# Altium PCB WAB_1_1_r3.PcbDoc (part 1 of 3)
Units mil, origin at the board's own origin, x right, y up, seen from the top; angles counter-clockwise.
Board outline 2714.17 x 3100 mil, 6 copper layers (TopLayer, GroundPlane1, MidLayer1, MidLayer2, GroundPlane2, BottomLayer), stack 59.8 mil thick; 41 components, 283 nets, 779 pads, 570 vias.
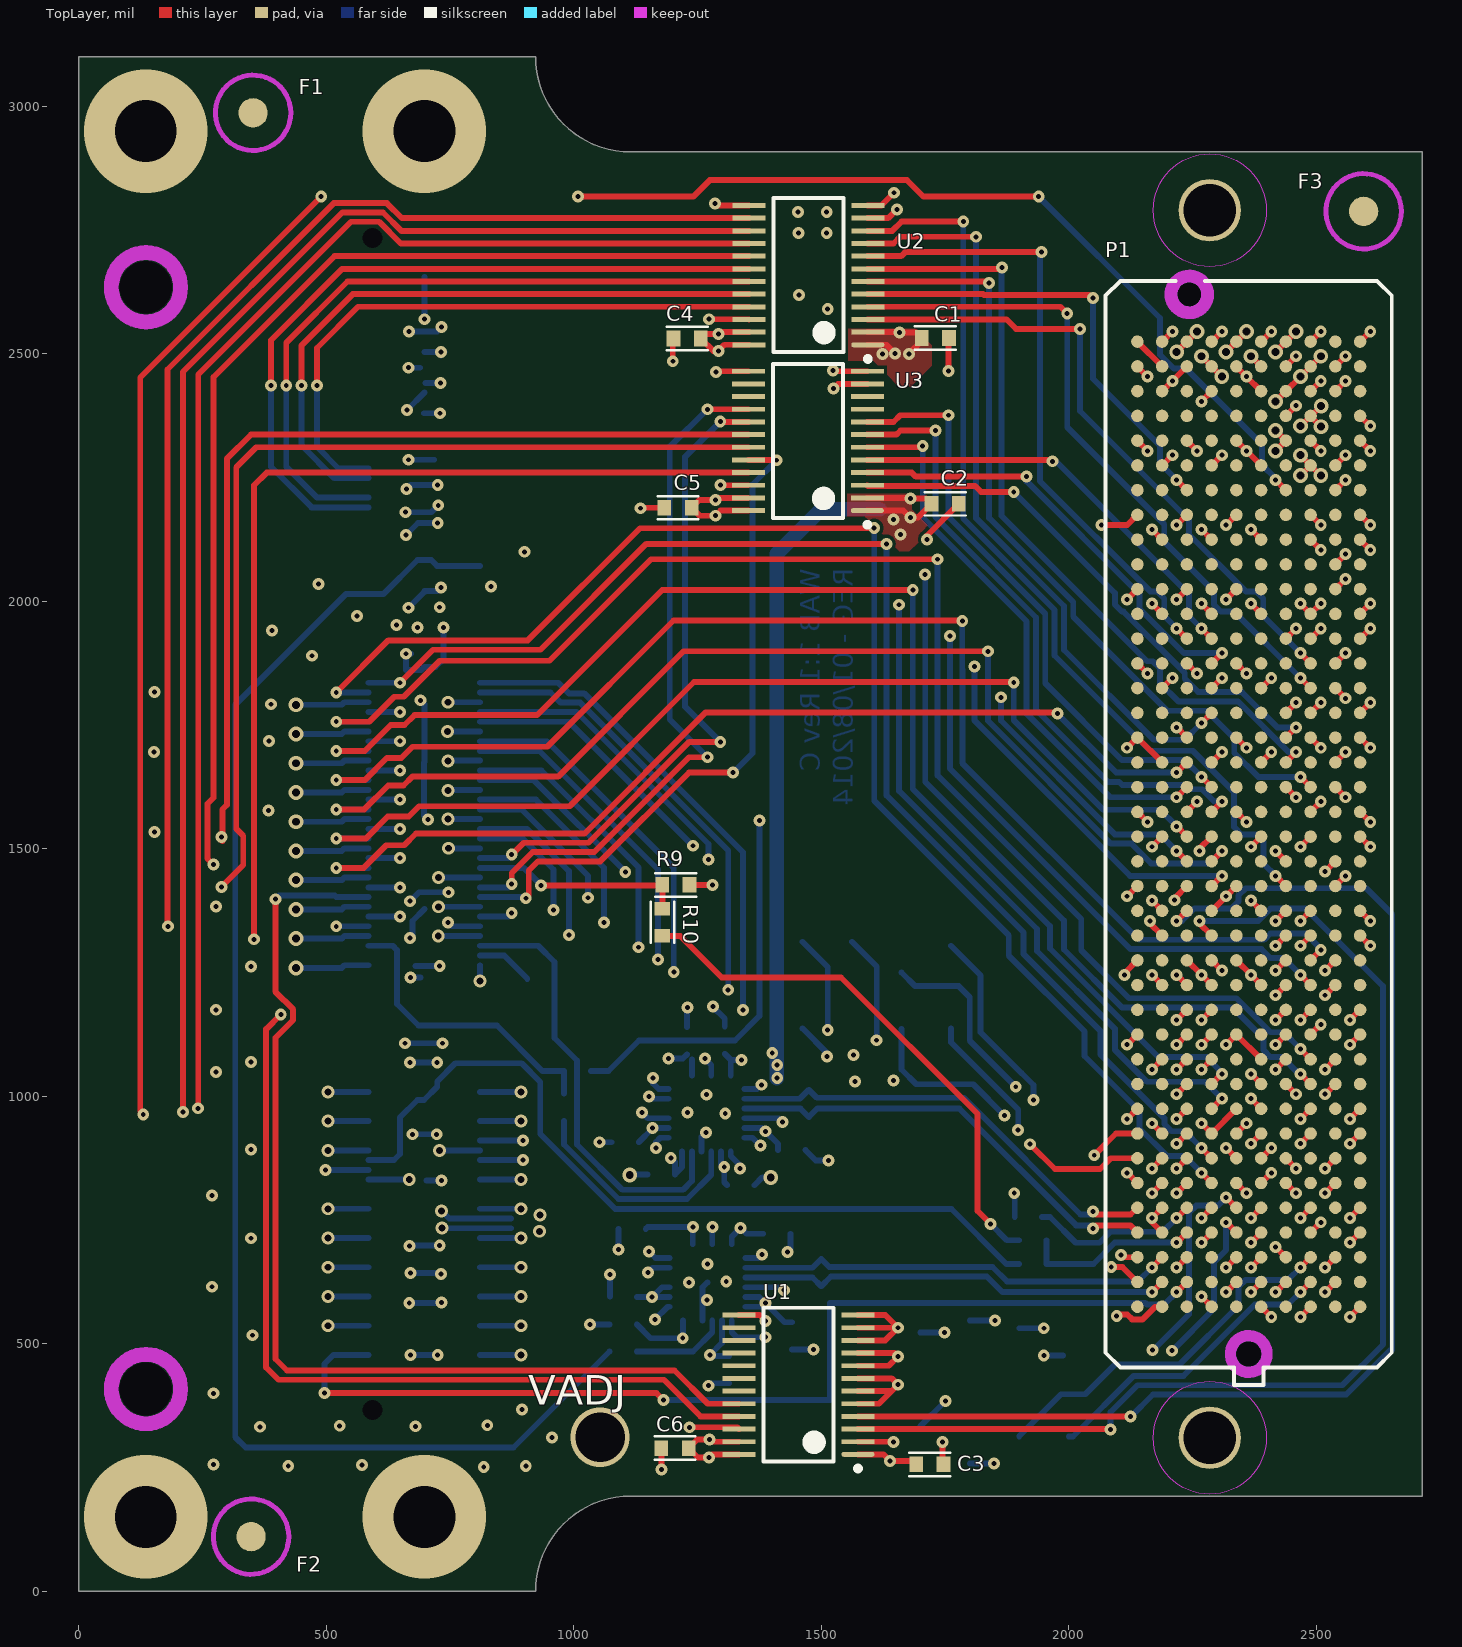
[diagram p0: TopLayer view]
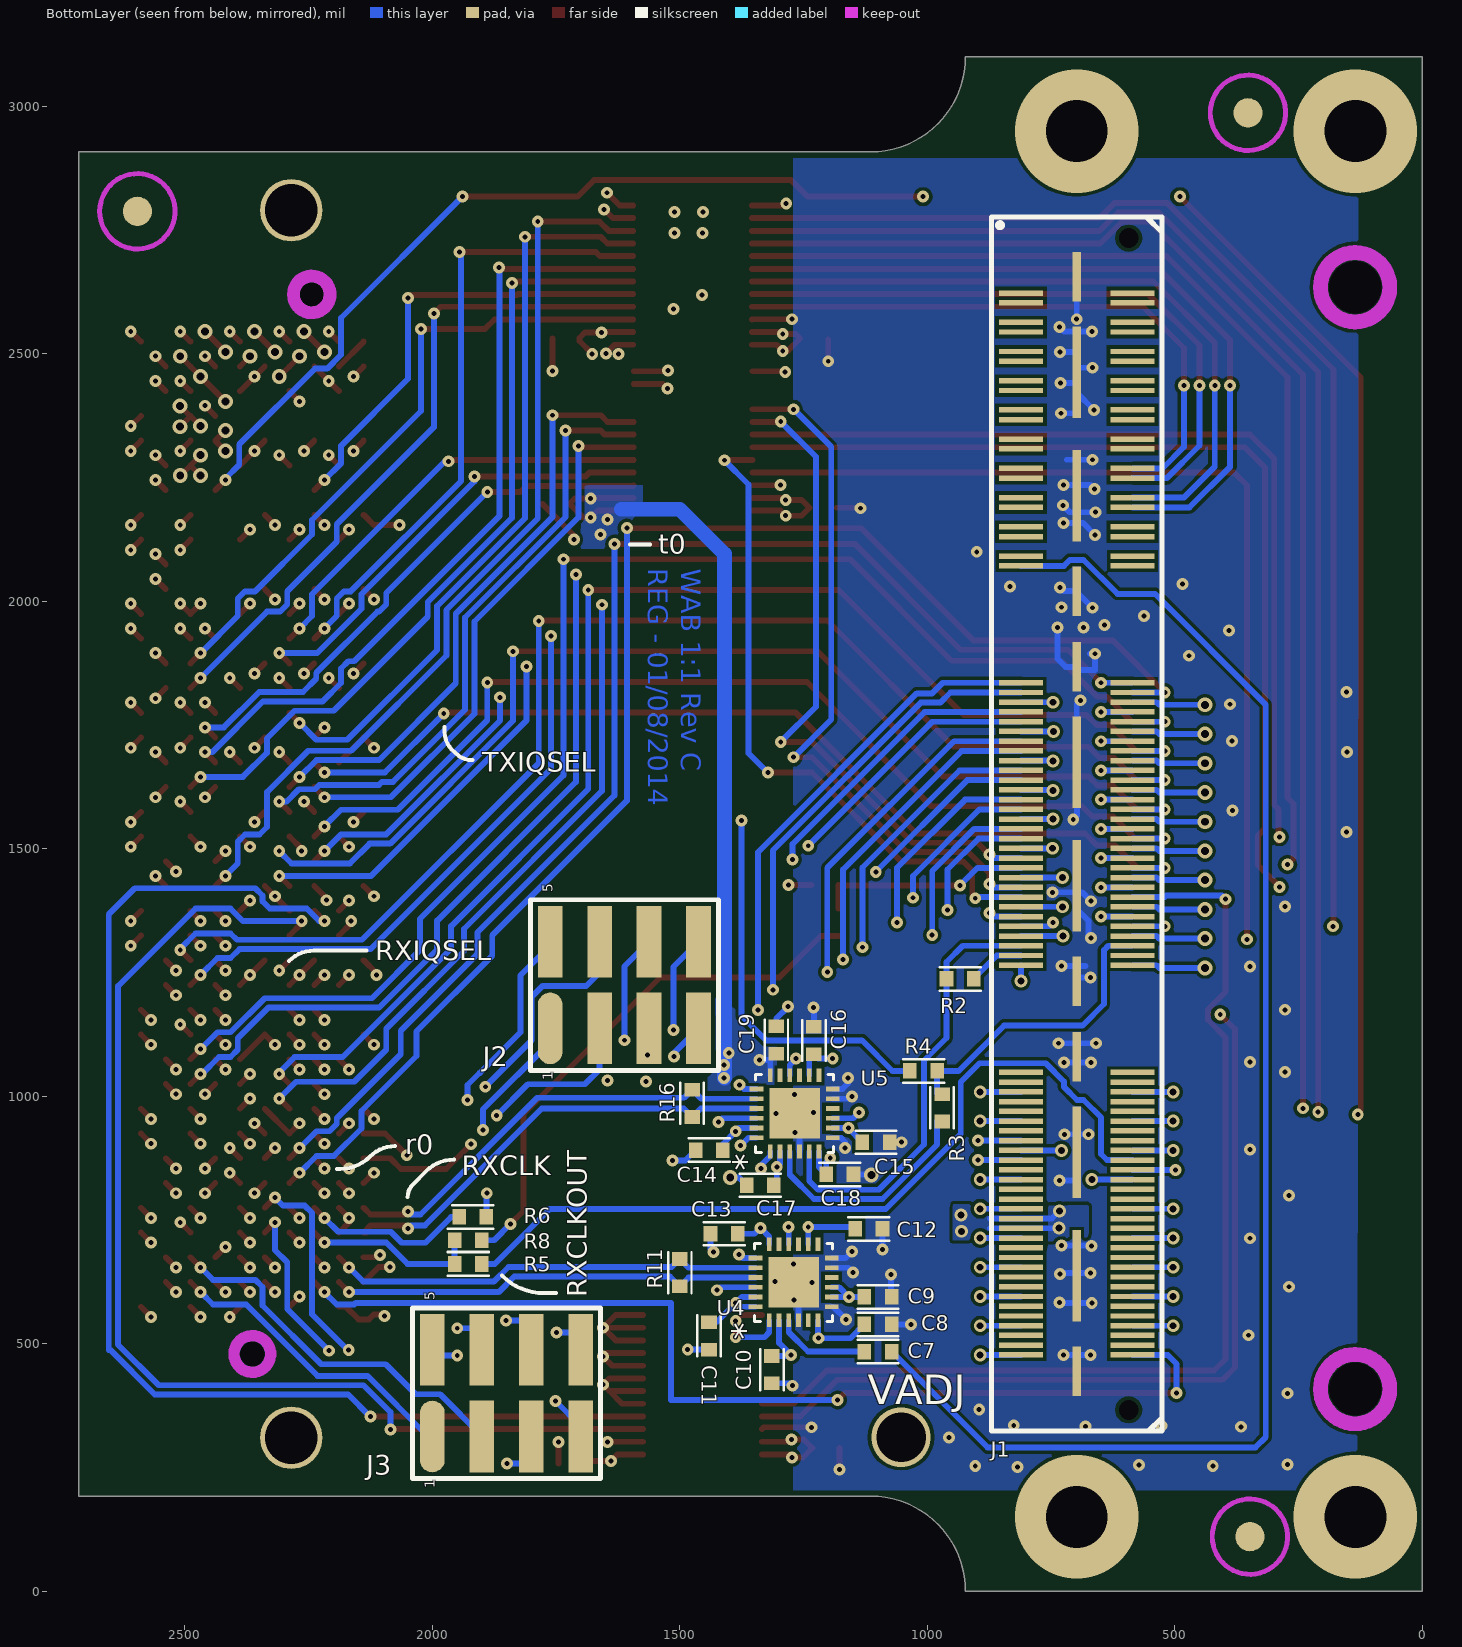
[diagram p1: BottomLayer view, seen from below]
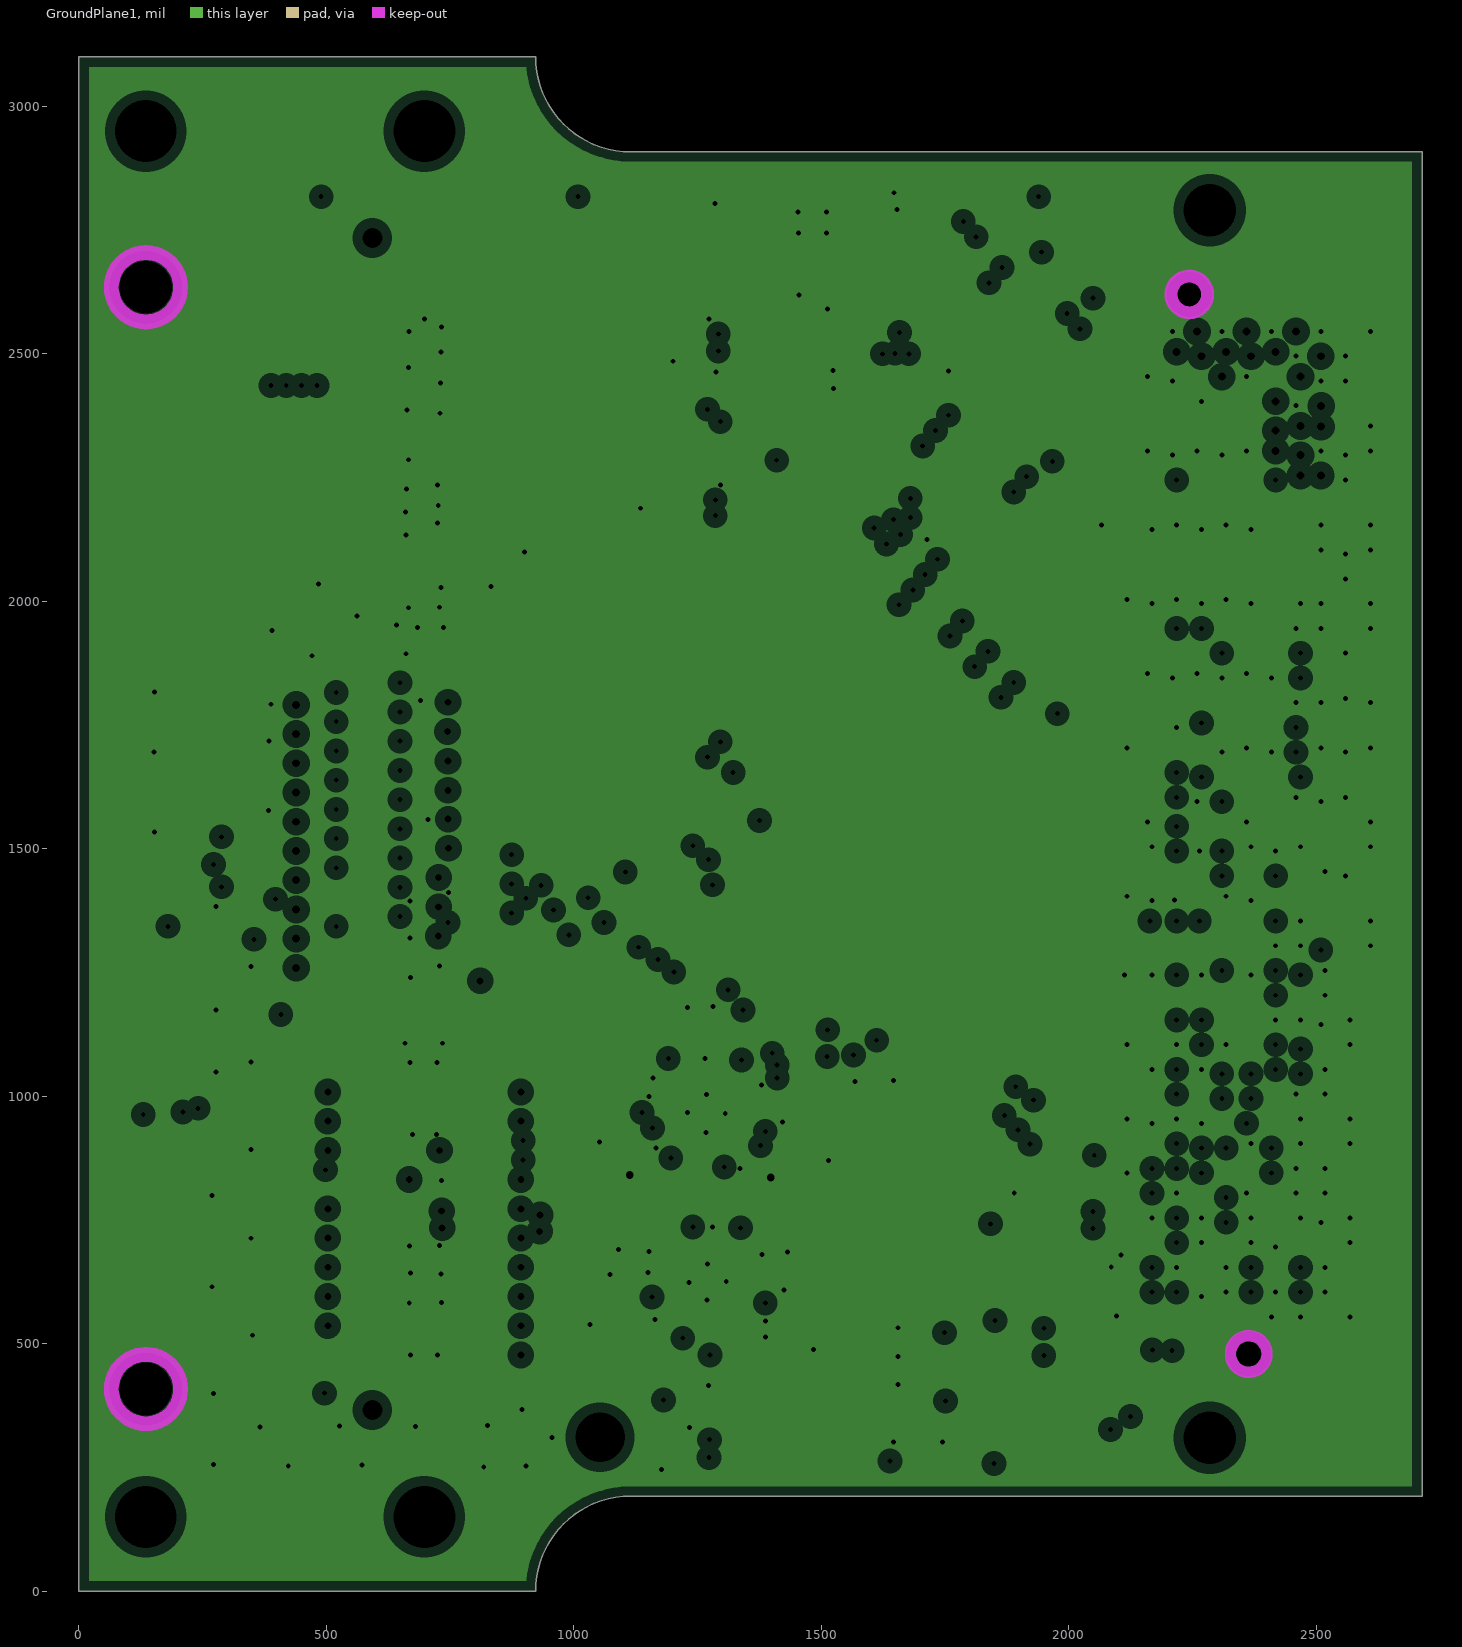
[diagram p2: GroundPlane1, clearances drawn from the general rule]
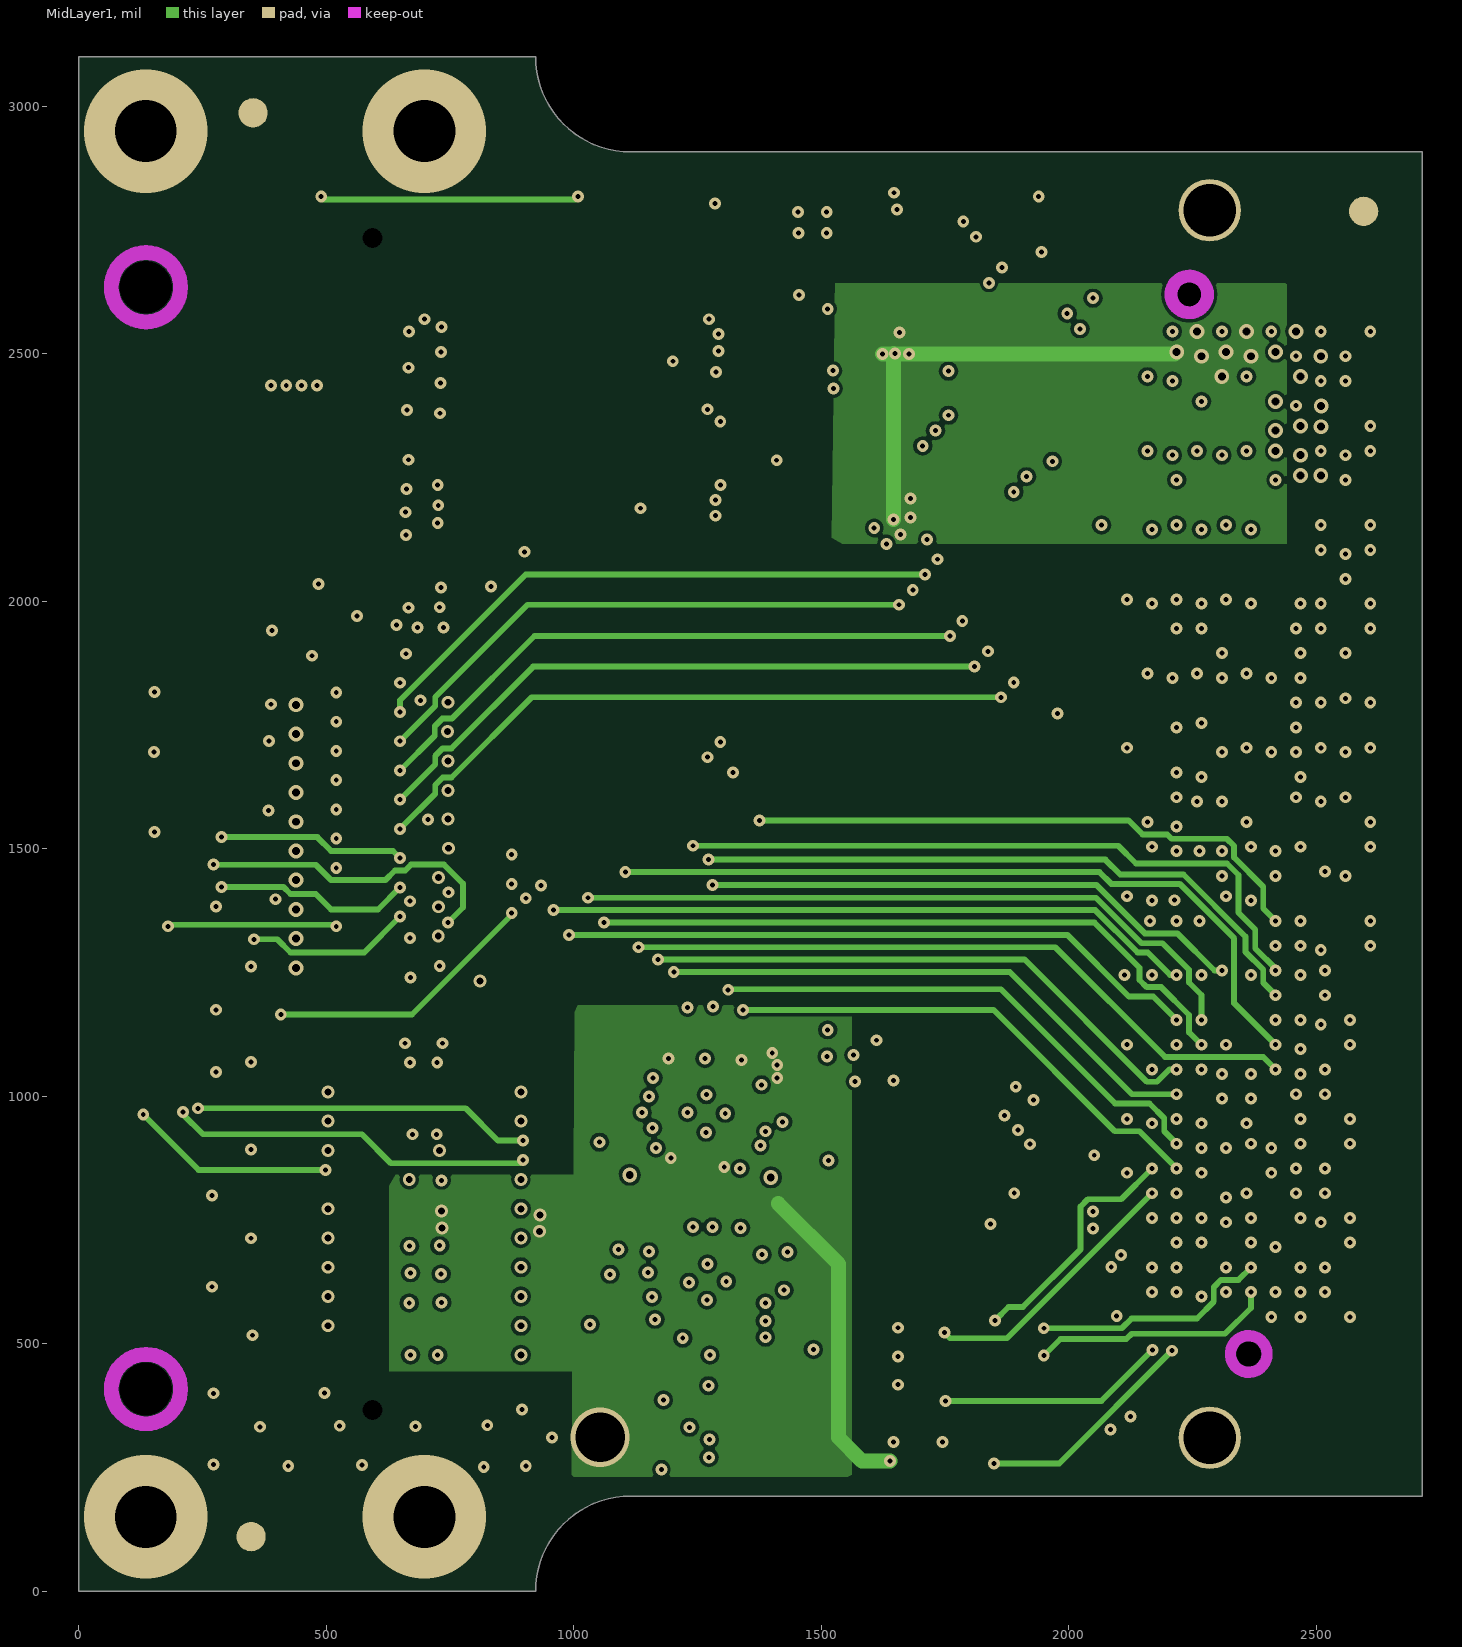
[diagram p3: MidLayer1]
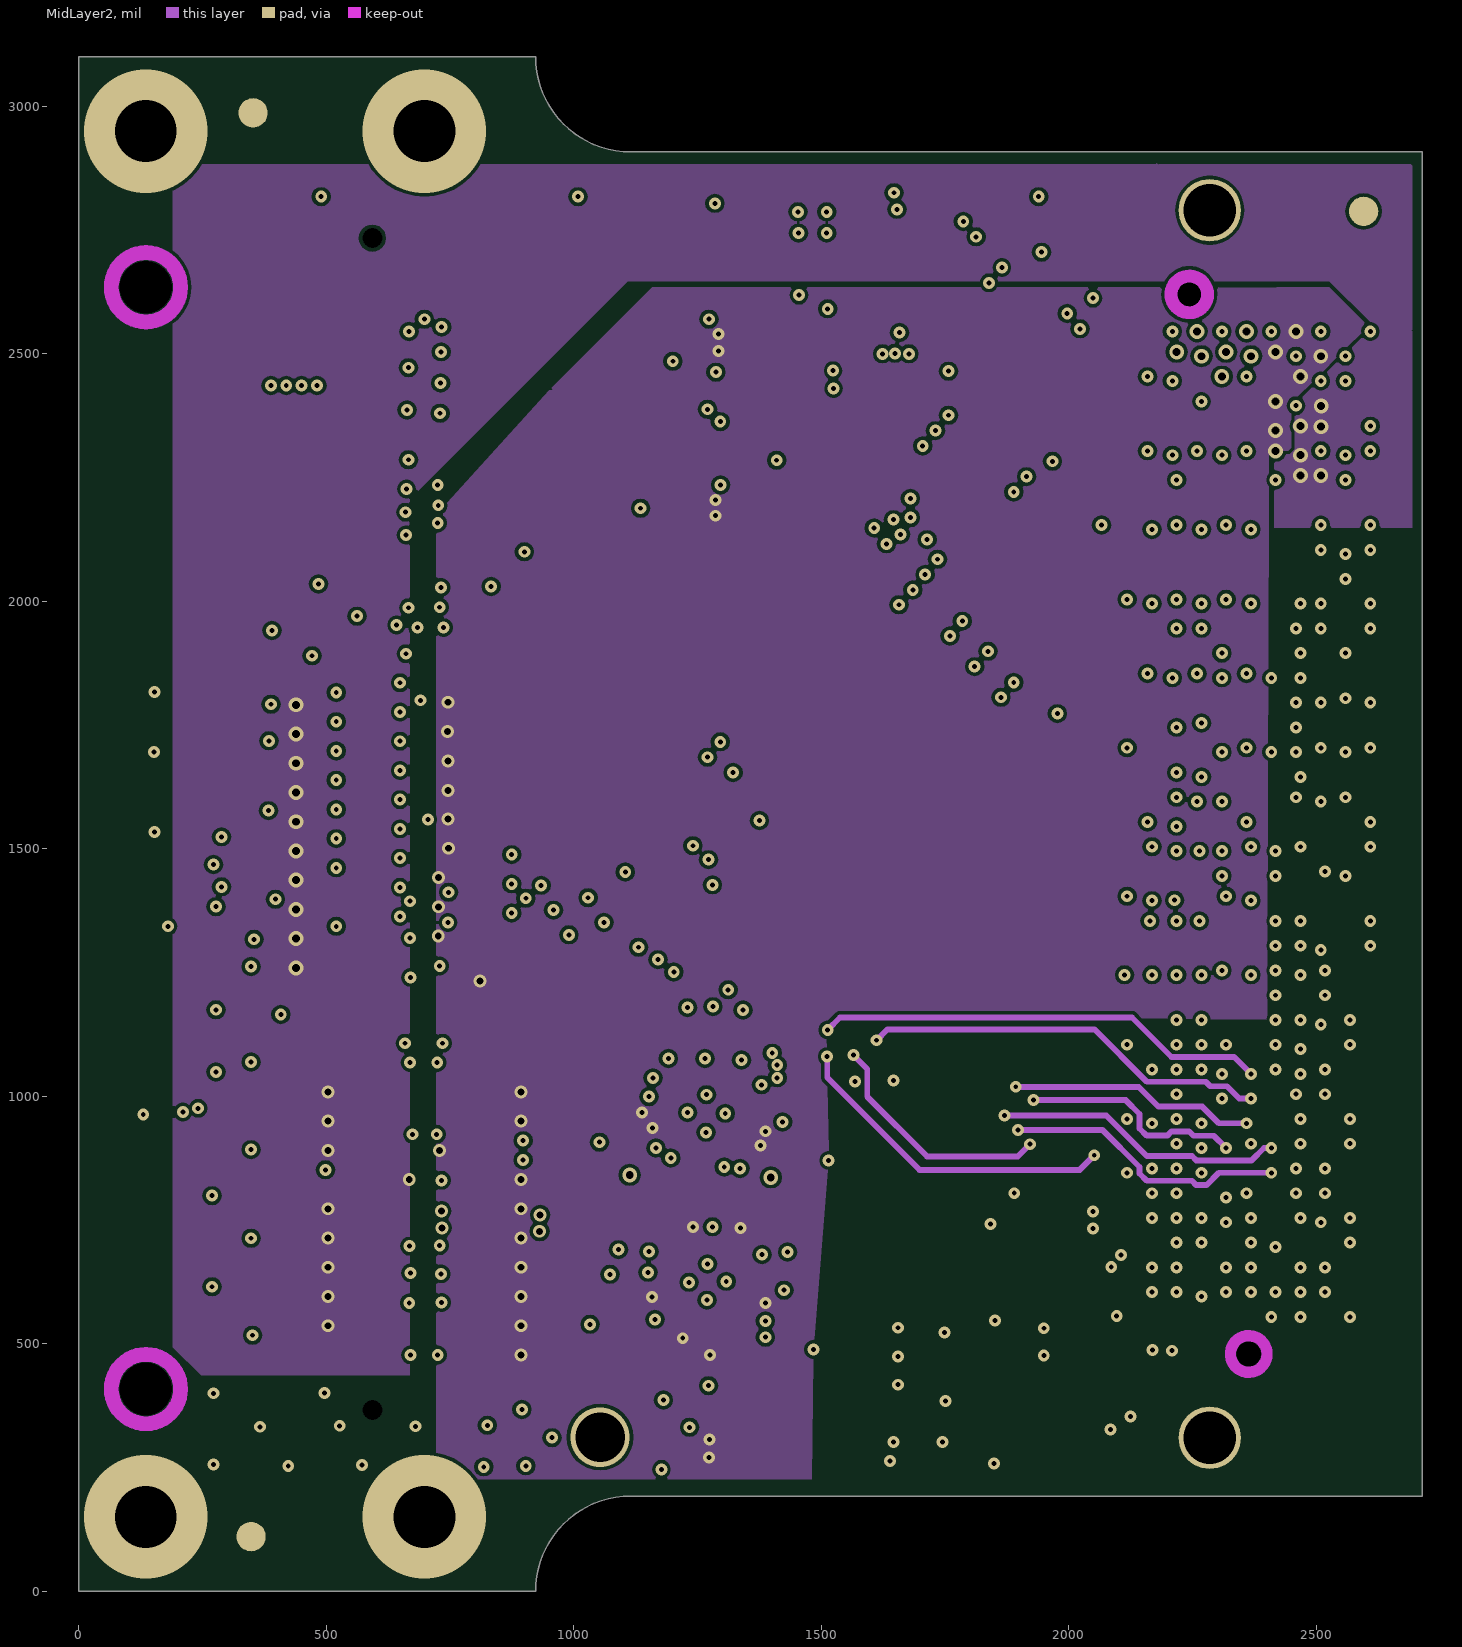
[diagram p4: MidLayer2]
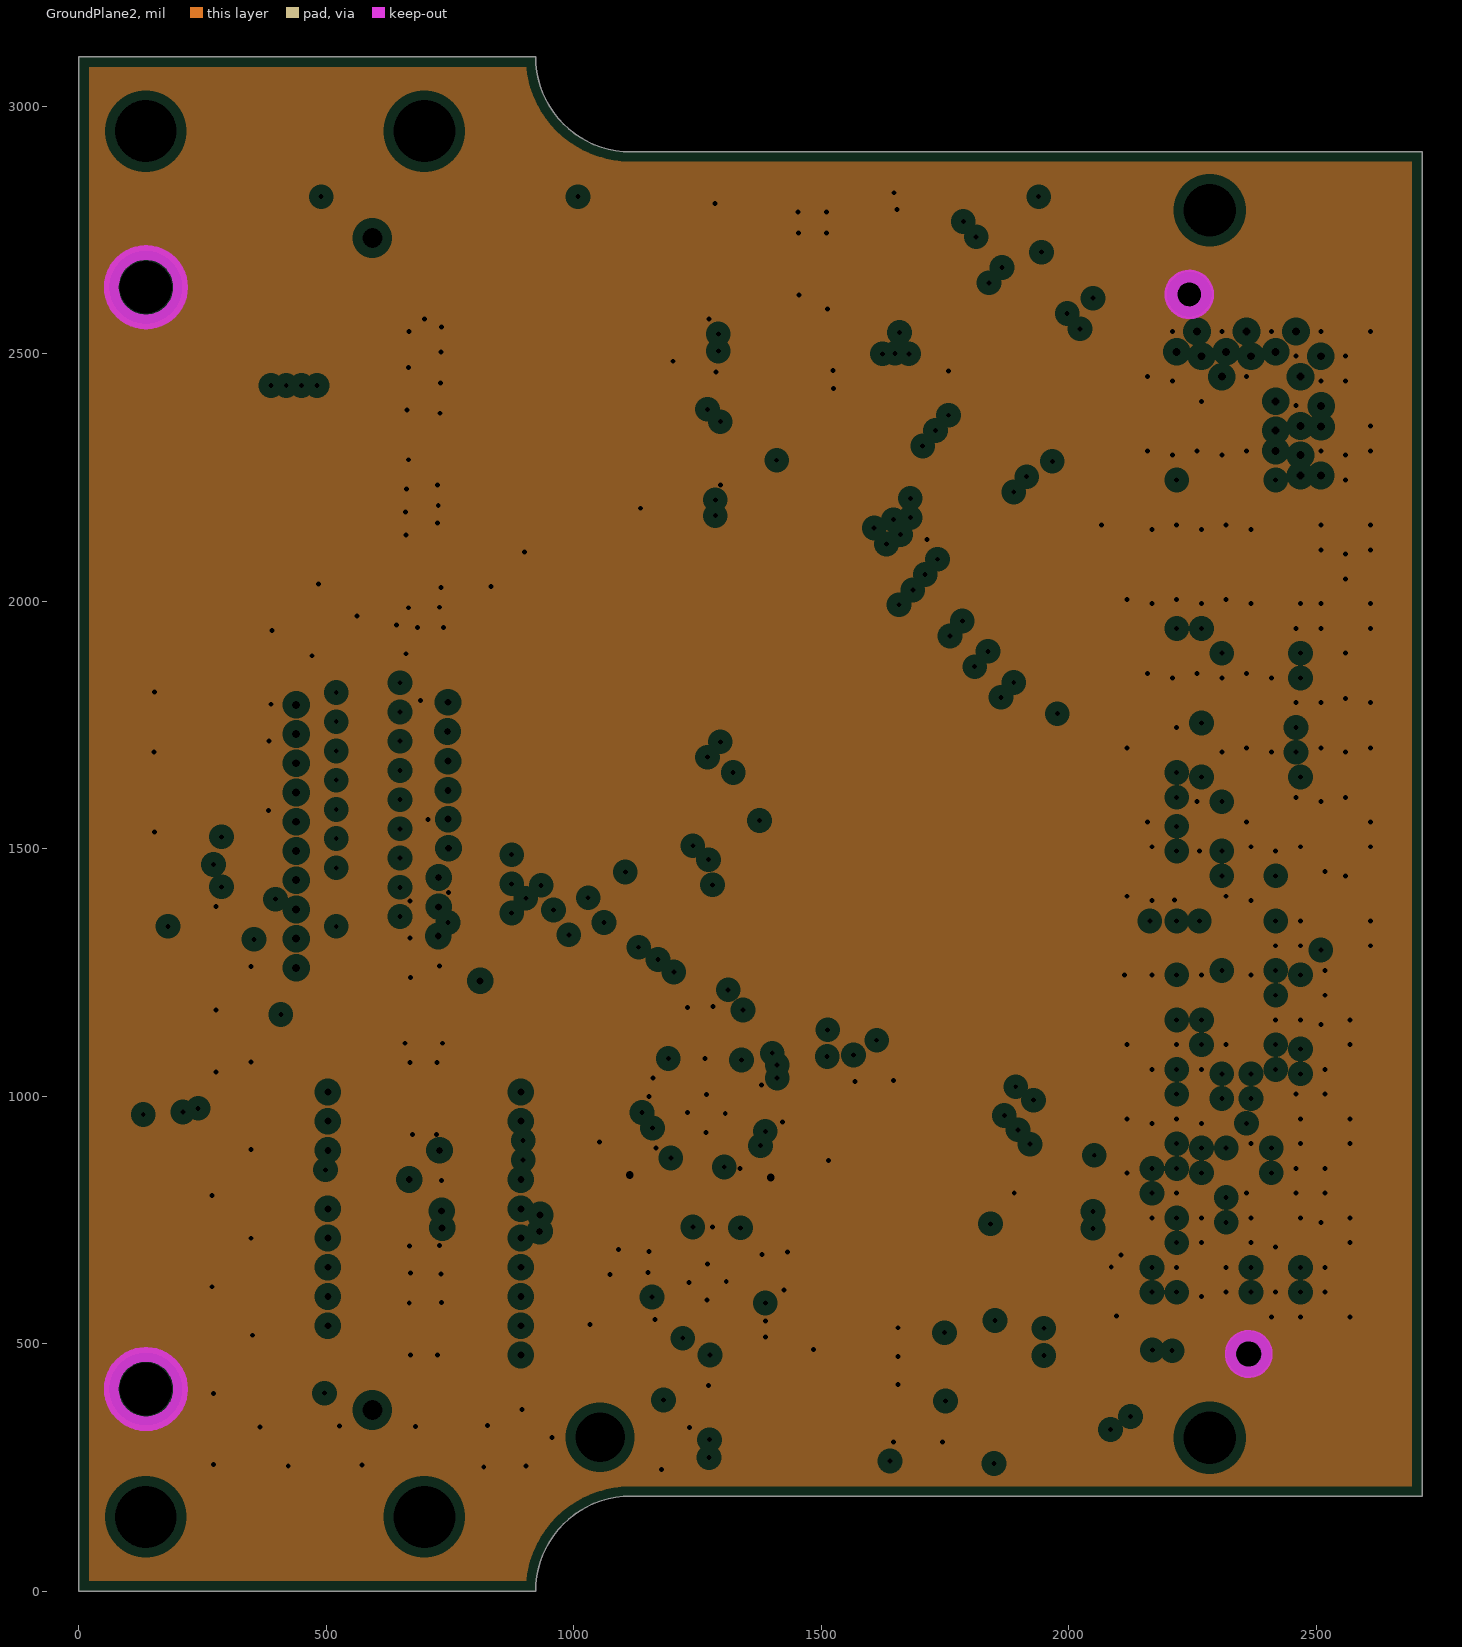
[diagram p5: GroundPlane2, clearances drawn from the general rule]

## Layer stack, top to bottom
TopSolder: solder mask 0.4, PSR-4000BN, Dk 4.5
TopLayer: signal copper 1.35
Dielectric1: core 7.4, Isola FR402, Dk 4.6
GroundPlane1: plane copper 1.35
Dielectric4: prepreg 14, Isola FR402, Dk 4.6
MidLayer1: signal copper 1.35
Dielectric3: core 8.9, Isola FR402, Dk 4.6
MidLayer2: signal copper 1.35
Dielectric2: prepreg 14, Isola FR402, Dk 4.6
GroundPlane2: plane copper 1.35
Dielectric5: core 7.4, Isola FR402, Dk 4.6
BottomLayer: signal copper 1.35
BottomSolder: solder mask 0.4, PSR-4000BN, Dk 4.5

## Board outline
0,0 922.83,0 cw(c1114.57,0) 1114.57,191.73 2714.17,191.73 2714.17,2908.27 1114.57,2908.27 cw(c1114.57,3100) 922.83,3100 0,3100

## Design rules (kind name [scope] priority, off if disabled: settings)
Clearance [All] p1: gap=7 ignorepadtopadclearanceinfootprint=FALSE except(0: Arc-Hole Track-Hole SMDPad-Hole THPad-Hole Via-Hole Fill-Hole Poly-Hole Region-Hole Text-Hole)
DiffPairsRouting [All] p1: maxlimit=10 minlimit=10 mostfreqgap=10 toplayer_minwidth=15 toplayer_maxwidth=15 toplayer_prefwidth=15 midlayer1_minwidth=15 midlayer1_maxwidth=15 midlayer1_prefwidth=15 midlayer2_minwidth=15 midlayer2_maxwidth=15 midlayer2_prefwidth=15 bottomlayer_minwidth=15 bottomlayer_maxwidth=15 bottomlayer_prefwidth=15 maxuncoupledlength=500
FabricationTestPointUsage TestPointUsage [All] p1: valid=0 allowmultiple=FALSE
FabricationTestpoint Testpoint [All] p1: side=3 testpointundercomponent=TRUE minsize=40 maxsize=100 preferedsize=60 minholesize=20 maxholesize=40 preferedholesize=32 testpointgrid=1 allowsidetop=TRUE allowsidebottom=TRUE usegrid=TRUE gridtolerance=0.01
Height "FMC, Page 24 Component Area Bottom,\"Max Height\"" [TouchesRoom('Component Aera Bottom')] p1: minheight=0 maxheight=39.37 prefheight=39.37
Height "FMC, Page 24 Component Area Top,\"Max Height\"" [TouchesRoom('Component Aera Top')] p2: minheight=0 maxheight=185.04 prefheight=185.04
Height "FMC, Page 24 I/O area,\"Max Height\"" [TouchesRoom('I/O Aera')] p3: minheight=0 maxheight=374.02 prefheight=374.02
MinimumAnnularRing [All] p1: minimumring=5
NetAntennae [All] p1: netantennaetolerance=1
PlaneClearance [All] p1: clearance=20
PlaneConnect [All] p1: planeconnectstyle=Direct reliefexpansion=20 reliefentries=4 reliefconductorwidth=10 reliefairgap=10
PolygonConnect [All] p1: connectstyle=Direct reliefconductorwidth=10 reliefentries=4 polygonreliefangle="90 Angle" airgapwidth=10
RoutingVias [All] p1: holewidth=10 width=24 viastyle="Through Hole" minholewidth=10 minwidth=24 maxholewidth=10 maxwidth=24
SilkToSolderMaskClearance SilkscreenOverComponentPads [IsPad] p1: minsilkscreentomaskgap=10 clearancetoexposedcopper=TRUE
SolderMaskExpansion [All] p1: expansion=3
Width Width_BottomLayer50 [OnLayer('BottomLayer')] p1: maxlimit=64.1 minlimit=11.83 preferedwidth=14.06 toplayer_maxwidth=40.04 toplayer_prefwidth=11.83 midlayer1_minwidth=14.06 midlayer2_minwidth=14.06 bottomlayer_maxwidth=40.04 bottomlayer_prefwidth=11.83 impedancedriven=TRUE minimp=10.000000 maximp=50.000000 favimp=50.000000
Width Width_TopLayer50 [OnLayer('TopLayer')] p2: maxlimit=64.1 minlimit=11.83 preferedwidth=14.06 toplayer_maxwidth=40.04 toplayer_prefwidth=11.83 midlayer1_minwidth=14.06 midlayer2_minwidth=14.06 bottomlayer_maxwidth=40.04 bottomlayer_prefwidth=11.83 impedancedriven=TRUE minimp=10.000000 maximp=50.000000 favimp=50.000000
Width Width_Default [All] p3: maxlimit=50 minlimit=10 preferedwidth=10
22 further rules are at their usual default settings.

## Classes and differential pairs
component class HPC_FMC_Connector: P1
net class GA[0..1]: GA0 GA1
differential pair HB21: +HB21_P -HB21_N
differential pair HB20: +HB20_P -HB20_N
differential pair HB19: +HB19_P -HB19_N
differential pair HB18: +HB18_P -HB18_N
differential pair HB17_CC: +HB17_CC_P -HB17_CC_N
differential pair HB16: +HB16_P -HB16_N
differential pair HB15: +HB15_P -HB15_N
differential pair HB14: +HB14_P -HB14_N
differential pair HB13: +HB13_P -HB13_N
differential pair HB12: +HB12_P -HB12_N
differential pair HB11: +HB11_P -HB11_N
differential pair HB10: +HB10_P -HB10_N
differential pair HB09: +HB09_P -HB09_N
differential pair HB08: +HB08_P -HB08_N
differential pair HB07: +HB07_P -HB07_N
differential pair HB06_CC: +HB06_CC_P -HB06_CC_N
differential pair HB05: +HB05_P -HB05_N
differential pair HB04: +HB04_P -HB04_N
differential pair HB03: +HB03_P -HB03_N
differential pair HB02: +HB02_P -HB02_N
differential pair HB01: +HB01_P -HB01_N
differential pair HB00_CC: +HB00_CC_P -HB00_CC_N
differential pair HA23: +HA23_P -HA23_N
differential pair HA22: +HA22_P -HA22_N
differential pair HA21: +HA21_P -HA21_N
differential pair HA20: +HA20_P -HA20_N
differential pair HA19: +HA19_P -HA19_N
differential pair HA18: +HA18_P -HA18_N
differential pair HA17_CC: +HA17_CC_P -HA17_CC_N
differential pair HA16: +HA16_P -HA16_N
differential pair HA15: +HA15_P -HA15_N
differential pair HA14: +HA14_P -HA14_N
differential pair HA13: +HA13_P -HA13_N
differential pair HA12: +HA12_P -HA12_N
differential pair HA11: +HA11_P -HA11_N
differential pair HA10: +HA10_P -HA10_N
differential pair HA09: +HA09_P -HA09_N
differential pair HA08: +HA08_P -HA08_N
differential pair HA07: +HA07_P -HA07_N
differential pair HA06: +HA06_P -HA06_N
differential pair HA05: +HA05_P -HA05_N
differential pair HA04: +HA04_P -HA04_N
differential pair HA03: +HA03_P -HA03_N
differential pair HA02: +HA02_P -HA02_N
differential pair HA01_CC: +HA01_CC_P -HA01_CC_N
differential pair HA00_CC: +HA00_CC_P -HA00_CC_N
differential pair GBTCLK0_M2C: +GBTCLK0_M2C_P -GBTCLK0_M2C_N
differential pair DP9_M2C: +DP9_M2C_P -DP9_M2C_N
differential pair DP9_C2M: +DP9_C2M_P -DP9_C2M_N
differential pair DP8_M2C: +DP8_M2C_P -DP8_M2C_N
differential pair DP8_C2M: +DP8_C2M_P -DP8_C2M_N
differential pair DP7_M2C: +DP7_M2C_P -DP7_M2C_N
differential pair DP7_C2M: +DP7_C2M_P -DP7_C2M_N
differential pair DP6_M2C: +DP6_M2C_P -DP6_M2C_N
differential pair DP6_C2M: +DP6_C2M_P -DP6_C2M_N
differential pair DP5_M2C: +DP5_M2C_P -DP5_M2C_N
differential pair DP5_C2M: +DP5_C2M_P -DP5_C2M_N
differential pair DP4_M2C: +DP4_M2C_P -DP4_M2C_N
differential pair DP4_C2M: +DP4_C2M_P -DP4_C2M_N
differential pair DP3_M2C: +DP3_M2C_P -DP3_M2C_N
differential pair DP3_C2M: +DP3_C2M_P -DP3_C2M_N
differential pair DP2_M2C: +DP2_M2C_P -DP2_M2C_N
differential pair DP2_C2M: +DP2_C2M_P -DP2_C2M_N
differential pair DP1_M2C: +DP1_M2C_P -DP1_M2C_N
differential pair DP1_C2M: +DP1_C2M_P -DP1_C2M_N
differential pair DP0_M2C: +DP0_M2C_P -DP0_M2C_N
differential pair DP0_C2M: +DP0_C2M_P -DP0_C2M_N
differential pair CLK3_BIDIR: +CLK3_BIDIR_P -CLK3_BIDIR_N
differential pair CLK2_BIDIR: +CLK2_BIDIR_P -CLK2_BIDIR_N
differential pair CLK1_M2C: +CLK1_M2C_P -CLK1_M2C_N
differential pair CLK0_M2C: +CLK0_M2C_P -CLK0_M2C_N

## Components (designator, comment, footprint, x,y, rotation, side; value= is the part's Value field where it differs from the comment)
C1 "0603" 0603_SMT_v3 1758,2532 r180 top
C2 "0603" 0603_SMT_v3 1778,2197 r180 top
C3 "0603" 0603_SMT_v3 1747,256 r180 top
C4 "0603" 0603_SMT_v3 1201.56,2531 r0 top
C5 "0603" 0603_SMT_v3 1183,2189 r0 top
C6 "0603" 0603_SMT_v3 1177,289 r0 top
C7 "0603" 0603_SMT_v3 1072,484 r0 bottom
C8 "0603" 0603_SMT_v3 1072,539 r0 bottom
C9 "0603" 0603_SMT_v3 1072,594.35 r0 bottom
C10 "0603" 0603_SMT_v3 1314,420 r90 bottom
C11 "0603" 0603_SMT_v3 1441,488 r90 bottom
C12 "0603" 0603_SMT_v3 1090.32,732 r0 bottom
C13 "0603" 0603_SMT_v3 1438,722 r180 bottom
C14 "0603" 0603_SMT_v3 1468,891 r180 bottom
C15 "0603" 0603_SMT_v3 1076,907 r0 bottom
C16 "0603" 0603_SMT_v3 1229,1140 r270 bottom
C17 "0603" 0603_SMT_v3 1365,820 r180 bottom
C18 "0603" 0603_SMT_v3 1149,842 r0 bottom
C19 "0603" 0603_SMT_v3 1305,1141 r270 bottom
F1 "Fiducial_1.5mm" 1.5mm_FIDUCIAL_v4 352,2987 r0 top
F2 "Fiducial_1.5mm" 1.5mm_FIDUCIAL_v4 348,110 r0 top
F3 "Fiducial_1.5mm" 1.5mm_FIDUCIAL_v4 2596,2788 r0 top
J1 "ASP-122953-01" ASP-122953-01_v2 698,1550 r270 bottom locked
J2 "Header SMT 4x2A 2.54mm" 2.54mm_4x2_HDR 1762,1312 r180 bottom
J3 "Header SMT 4x2A 2.54mm" 2.54mm_4x2_HDR 2000,487.37 r180 bottom
P1 "CN-2P-2M-R400" BTB-SM1-27-2V400M 2363.78,1549.61 r270 top locked
R2 "0603 DNP" 0603_SMT_v3 961,1237 r180 bottom
R3 "0603 DNP" 0603_SMT_v3 970,949 r90 bottom
R4 "0603" 0603_SMT_v3 1035,1051.12 r180 bottom
R5 "0603" 0603_SMT_v3 1955,661 r180 bottom
R6 "0603 DNP" 0603_SMT_v3 1946,756 r180 bottom
R8 "0603 DNP" 0603_SMT_v3 1955,709 r180 bottom
R9 "0603" 0603_SMT_v3 1178.71,1427 r0 top
R10 "0603 DNP" 0603_SMT_v3 1179,1379 r270 top
R11 "0603" 0603_SMT_v3 1500,671 r270 bottom
R16 "0603" 0603_SMT_v3 1475,1013 r270 bottom
U1 "Level Shifter" TSSOP-24_TI 1454,417 r180 top
U2 "Level Shifter" TSSOP-24_TI 1474,2659 r180 top
U3 "Level Shifter" TSSOP-24_TI 1473,2324 r180 top
U4 "RF Reference Clock Buffer" RTW24 1270,623.88 r90 bottom
U5 "Sampling Clock Buffer" RTW24 1268,965.24 r90 bottom

## Footprints (in the part's own frame and the unit in brackets; to place one, negate y for a bottom-side part, rotate by r counter-clockwise, add the part's x,y. Pads: shape width x height; smd on the part's side, far side on the other; paste and mask are expansions set on the pad)
1.5mm_FIDUCIAL_v4 [mm] "Fiducial Mark - large size w 1mm clearance"
  round 1.5 all layers, no hole paste-0.75 mask+1: 0(0,0)
  TopLayer keep-out circle w0.254: c0,0 r1.934
  BottomLayer keep-out circle w0.254: c0,0 r1.934
2.54mm_4x2_HDR [mm] "4x2 SMT Pin Header, 2.54mm Pitch"
  oval 1.27x3.68 smd: 1(0,-4.445)
  rect 1.27x3.68 smd: 2(2.54,-4.445) 3(5.08,-4.445) 4(7.62,-4.445) 5(0,0) 6(2.54,0) 7(5.08,0) 8(7.62,0)
  silkscreen extent -1.02,-6.6 8.64,2.16
0603_SMT_v3 [mm] "0603 Chip Cap, Res, Ind"
  rect 0.7x0.8 smd: 1(0,0) 2(1.4,0)
  silkscreen extent -0.35,-0.6 1.75,0.6, body extent -0.1,-0.4 1.5,0.4, height 0.5
ASP-122953-01_v2 [mil] "Samtec HSMC Motherboard Connector"
  rect 11x89.5 smd mask+2: 1(-1072.83,-112.75) 2(-1072.83,112.75) 3(-1053.15,-112.75) 4(-1053.15,112.75) 5(-1013.78,-112.75) 6(-1013.78,112.75) 7(-994.09,-112.75) 8(-994.09,112.75) 9(-954.72,-112.75) 10(-954.72,112.75) 11(-935.04,-112.75) 12(-935.04,112.75) 13(-895.67,-112.75) 14(-895.67,112.75) 15(-875.98,-112.75) 16(-875.98,112.75) 17(-836.61,-112.75) 18(-836.61,112.75) 19(-816.93,-112.75) 20(-816.93,112.75) 21(-777.56,-112.75) 22(-777.56,112.75) 23(-757.87,-112.75) 24(-757.87,112.75) 25(-718.5,-112.75) 26(-718.5,112.75) 27(-698.82,-112.75) 28(-698.82,112.75) 29(-659.45,-112.75) 30(-659.45,112.75) 31(-639.76,-112.75) 32(-639.76,112.75) 33(-600.39,-112.75) 34(-600.39,112.75) 35(-580.71,-112.75) 36(-580.71,112.75) 37(-541.34,-112.75) 38(-541.34,112.75) 39(-521.65,-112.75) 40(-521.65,112.75) 41(-285.43,-112.75) 42(-285.43,112.75) 43(-265.75,-112.75) 44(-265.75,112.75) 45(-246.06,-112.75) 46(-246.06,112.75) 47(-226.38,-112.75) 48(-226.38,112.75) 49(-206.69,-112.75) 50(-206.69,112.75) 51(-187.01,-112.75) 52(-187.01,112.75) 53(-167.32,-112.75) 54(-167.32,112.75) 55(-147.64,-112.75) 56(-147.64,112.75) 57(-127.95,-112.75) 58(-127.95,112.75) 59(-108.27,-112.75) 60(-108.27,112.75) 61(-88.58,-112.75) 62(-88.58,112.75) 63(-68.9,-112.75) 64(-68.9,112.75) 65(-49.21,-112.75) 66(-49.21,112.75) 67(-29.53,-112.75) 68(-29.53,112.75) 69(-9.84,-112.75) 70(-9.84,112.75) 71(9.84,-112.75) 72(9.84,112.75) 73(29.53,-112.75) 74(29.53,112.75) 75(49.21,-112.75) 76(49.21,112.75) 77(68.9,-112.75) 78(68.9,112.75) 79(88.58,-112.75) 80(88.58,112.75) 81(108.27,-112.75) 82(108.27,112.75) 83(127.95,-112.75) 84(127.95,112.75) 85(147.64,-112.75) 86(147.64,112.75) 87(167.32,-112.75) 88(167.32,112.75) 89(187.01,-112.75) 90(187.01,112.75) 91(206.69,-112.75) 92(206.69,112.75) 93(226.38,-112.75) 94(226.38,112.75) 95(246.06,-112.75) 96(246.06,112.75) 97(265.75,-112.75) 98(265.75,112.75) 99(285.43,-112.75) 100(285.43,112.75) 101(501.97,-112.75) 102(501.97,112.75) 103(521.65,-112.75) 104(521.65,112.75) 105(541.34,-112.75) 106(541.34,112.75) 107(561.02,-112.75) 108(561.02,112.75) 109(580.71,-112.75) 110(580.71,112.75) 111(600.39,-112.75) 112(600.39,112.75) 113(620.08,-112.75) 114(620.08,112.75) 115(639.76,-112.75) 116(639.76,112.75) 117(659.45,-112.75) 118(659.45,112.75) 119(679.13,-112.75) 120(679.13,112.75) 121(698.82,-112.75) 122(698.82,112.75) 123(718.5,-112.75) 124(718.5,112.75) 125(738.19,-112.75) 126(738.19,112.75) 127(757.87,-112.75) 128(757.87,112.75) 129(777.56,-112.75) 130(777.56,112.75) 131(797.24,-112.75) 132(797.24,112.75) 133(816.93,-112.75) 134(816.93,112.75) 135(836.61,-112.75) 136(836.61,112.75) 137(856.3,-112.75) 138(856.3,112.75) 139(875.98,-112.75) 140(875.98,112.75) 141(895.67,-112.75) 142(895.67,112.75) 143(915.35,-112.75) 144(915.35,112.75) 145(935.04,-112.75) 146(935.04,112.75) 147(954.72,-112.75) 148(954.72,112.75) 149(974.41,-112.75) 150(974.41,112.75) 151(994.09,-112.75) 152(994.09,112.75) 153(1013.78,-112.75) 154(1013.78,112.75) 155(1033.46,-112.75) 156(1033.46,112.75) 157(1053.15,-112.75) 158(1053.15,112.75) 159(1072.83,-112.75) 160(1072.83,112.75)
  rect 100x17 smd mask+2: 161(-1105.5,0) 164(-470.5,0) 165(-317.5,0) 168(317.5,0) 169(470.5,0) 172(1105.5,0)
  rect 185x17 smd mask+2: 162(-913,0) 163(-663,0) 166(-125,0) 167(125,0) 170(663,0) 171(913,0)
  round 0 hole 40 unplated: 173(-1184,105) 174(1184,105)
  silkscreen extent -1226,-173 1226,173, body extent -1206,-147 1206,148, height 127
BTB-SM1-27-2V400M [mm] "Board-to-Board Connector, Vertical, 10-Row, Pitch 1.27mm, 400-Position"
  round 0.64 smd: A1(24.765,5.715) A2(23.495,5.715) A3(22.225,5.715) A4(20.955,5.715) A5(19.685,5.715) A6(18.415,5.715) A7(17.145,5.715) A8(15.875,5.715) A9(14.605,5.715) A10(13.335,5.715) A11(12.065,5.715) A12(10.795,5.715) A13(9.525,5.715) A14(8.255,5.715) A15(6.985,5.715) A16(5.715,5.715) A17(4.445,5.715) A18(3.175,5.715) A19(1.905,5.715) A20(0.635,5.715) A21(-0.635,5.715) A22(-1.905,5.715) A23(-3.175,5.715) A24(-4.445,5.715) A25(-5.715,5.715) A26(-6.985,5.715) A27(-8.255,5.715) A28(-9.525,5.715) A29(-10.795,5.715) A30(-12.065,5.715) A31(-13.335,5.715) A32(-14.605,5.715) A33(-15.875,5.715) A34(-17.145,5.715) A35(-18.415,5.715) A36(-19.685,5.715) A37(-20.955,5.715) A38(-22.225,5.715) A39(-23.495,5.715) A40(-24.765,5.715) B1(24.765,4.445) B2(23.495,4.445) B3(22.225,4.445) B4(20.955,4.445) B5(19.685,4.445) B6(18.415,4.445) B7(17.145,4.445) B8(15.875,4.445) B9(14.605,4.445) B10(13.335,4.445) B11(12.065,4.445) B12(10.795,4.445) B13(9.525,4.445) B14(8.255,4.445) B15(6.985,4.445) B16(5.715,4.445) B17(4.445,4.445) B18(3.175,4.445) B19(1.905,4.445) B20(0.635,4.445) B21(-0.635,4.445) B22(-1.905,4.445) B23(-3.175,4.445) B24(-4.445,4.445) B25(-5.715,4.445) B26(-6.985,4.445) B27(-8.255,4.445) B28(-9.525,4.445) B29(-10.795,4.445) B30(-12.065,4.445) B31(-13.335,4.445) B32(-14.605,4.445) B33(-15.875,4.445) B34(-17.145,4.445) B35(-18.415,4.445) B36(-19.685,4.445) B37(-20.955,4.445) B38(-22.225,4.445) B39(-23.495,4.445) B40(-24.765,4.445) C1(24.765,3.175) C2(23.495,3.175) C3(22.225,3.175) C4(20.955,3.175) C5(19.685,3.175) C6(18.415,3.175) C7(17.145,3.175) C8(15.875,3.175) C9(14.605,3.175) C10(13.335,3.175) C11(12.065,3.175) C12(10.795,3.175) C13(9.525,3.175) C14(8.255,3.175) C15(6.985,3.175) C16(5.715,3.175) C17(4.445,3.175) C18(3.175,3.175) C19(1.905,3.175) C20(0.635,3.175) C21(-0.635,3.175) C22(-1.905,3.175) C23(-3.175,3.175) C24(-4.445,3.175) C25(-5.715,3.175) C26(-6.985,3.175) C27(-8.255,3.175) C28(-9.525,3.175) C29(-10.795,3.175) C30(-12.065,3.175) C31(-13.335,3.175) C32(-14.605,3.175) C33(-15.875,3.175) C34(-17.145,3.175) C35(-18.415,3.175) C36(-19.685,3.175) C37(-20.955,3.175) C38(-22.225,3.175) C39(-23.495,3.175) C40(-24.765,3.175) D1(24.765,1.905) D2(23.495,1.905) D3(22.225,1.905) D4(20.955,1.905) D5(19.685,1.905) D6(18.415,1.905) D7(17.145,1.905) D8(15.875,1.905) D9(14.605,1.905) D10(13.335,1.905) D11(12.065,1.905) D12(10.795,1.905) D13(9.525,1.905) D14(8.255,1.905) D15(6.985,1.905) D16(5.715,1.905) D17(4.445,1.905) D18(3.175,1.905) D19(1.905,1.905) D20(0.635,1.905) D21(-0.635,1.905) D22(-1.905,1.905) D23(-3.175,1.905) D24(-4.445,1.905) D25(-5.715,1.905) D26(-6.985,1.905) D27(-8.255,1.905) D28(-9.525,1.905) D29(-10.795,1.905) D30(-12.065,1.905) D31(-13.335,1.905) D32(-14.605,1.905) D33(-15.875,1.905) D34(-17.145,1.905) D35(-18.415,1.905) D36(-19.685,1.905) D37(-20.955,1.905) D38(-22.225,1.905) D39(-23.495,1.905) D40(-24.765,1.905) E1(24.765,0.635) E2(23.495,0.635) E3(22.225,0.635) E4(20.955,0.635) E5(19.685,0.635) E6(18.415,0.635) E7(17.145,0.635) E8(15.875,0.635) E9(14.605,0.635) E10(13.335,0.635) E11(12.065,0.635) E12(10.795,0.635) E13(9.525,0.635) E14(8.255,0.635) E15(6.985,0.635) E16(5.715,0.635) E17(4.445,0.635) E18(3.175,0.635) E19(1.905,0.635) E20(0.635,0.635) E21(-0.635,0.635) E22(-1.905,0.635) E23(-3.175,0.635) E24(-4.445,0.635) E25(-5.715,0.635) E26(-6.985,0.635) E27(-8.255,0.635) E28(-9.525,0.635) E29(-10.795,0.635) E30(-12.065,0.635) E31(-13.335,0.635) E32(-14.605,0.635) E33(-15.875,0.635) E34(-17.145,0.635) E35(-18.415,0.635) E36(-19.685,0.635) E37(-20.955,0.635) E38(-22.225,0.635) E39(-23.495,0.635) E40(-24.765,0.635) F1(24.765,-0.635) F2(23.495,-0.635) F3(22.225,-0.635) F4(20.955,-0.635) F5(19.685,-0.635) F6(18.415,-0.635) F7(17.145,-0.635) F8(15.875,-0.635) F9(14.605,-0.635) F10(13.335,-0.635) F11(12.065,-0.635) F12(10.795,-0.635) F13(9.525,-0.635) F14(8.255,-0.635) F15(6.985,-0.635) F16(5.715,-0.635) F17(4.445,-0.635) F18(3.175,-0.635) F19(1.905,-0.635) F20(0.635,-0.635) F21(-0.635,-0.635) F22(-1.905,-0.635) F23(-3.175,-0.635) F24(-4.445,-0.635) F25(-5.715,-0.635) F26(-6.985,-0.635) F27(-8.255,-0.635) F28(-9.525,-0.635) F29(-10.795,-0.635) F30(-12.065,-0.635) F31(-13.335,-0.635) F32(-14.605,-0.635) F33(-15.875,-0.635) F34(-17.145,-0.635) F35(-18.415,-0.635) F36(-19.685,-0.635) F37(-20.955,-0.635) F38(-22.225,-0.635) F39(-23.495,-0.635) F40(-24.765,-0.635) G1(24.765,-1.905) G2(23.495,-1.905) G3(22.225,-1.905) G4(20.955,-1.905) G5(19.685,-1.905) G6(18.415,-1.905) G7(17.145,-1.905) G8(15.875,-1.905) G9(14.605,-1.905) G10(13.335,-1.905) G11(12.065,-1.905) G12(10.795,-1.905) G13(9.525,-1.905) G14(8.255,-1.905) G15(6.985,-1.905) G16(5.715,-1.905) G17(4.445,-1.905) G18(3.175,-1.905) G19(1.905,-1.905) G20(0.635,-1.905) G21(-0.635,-1.905) G22(-1.905,-1.905) G23(-3.175,-1.905) G24(-4.445,-1.905) G25(-5.715,-1.905) G26(-6.985,-1.905) G27(-8.255,-1.905) G28(-9.525,-1.905) G29(-10.795,-1.905) G30(-12.065,-1.905) G31(-13.335,-1.905) G32(-14.605,-1.905) G33(-15.875,-1.905) G34(-17.145,-1.905) G35(-18.415,-1.905) G36(-19.685,-1.905) G37(-20.955,-1.905) G38(-22.225,-1.905) G39(-23.495,-1.905) G40(-24.765,-1.905) H1(24.765,-3.175) H2(23.495,-3.175) H3(22.225,-3.175) H4(20.955,-3.175) H5(19.685,-3.175) H6(18.415,-3.175) H7(17.145,-3.175) H8(15.875,-3.175) H9(14.605,-3.175) H10(13.335,-3.175) H11(12.065,-3.175) H12(10.795,-3.175) H13(9.525,-3.175) H14(8.255,-3.175) H15(6.985,-3.175) H16(5.715,-3.175) H17(4.445,-3.175) H18(3.175,-3.175) H19(1.905,-3.175) H20(0.635,-3.175) H21(-0.635,-3.175) H22(-1.905,-3.175) H23(-3.175,-3.175) H24(-4.445,-3.175) H25(-5.715,-3.175) H26(-6.985,-3.175) H27(-8.255,-3.175) H28(-9.525,-3.175) H29(-10.795,-3.175) H30(-12.065,-3.175) H31(-13.335,-3.175) H32(-14.605,-3.175) H33(-15.875,-3.175) H34(-17.145,-3.175) H35(-18.415,-3.175) H36(-19.685,-3.175) H37(-20.955,-3.175) H38(-22.225,-3.175) H39(-23.495,-3.175) H40(-24.765,-3.175) J1(24.765,-4.445) J2(23.495,-4.445) J3(22.225,-4.445) J4(20.955,-4.445) J5(19.685,-4.445) J6(18.415,-4.445) J7(17.145,-4.445) J8(15.875,-4.445) J9(14.605,-4.445) J10(13.335,-4.445) J11(12.065,-4.445) J12(10.795,-4.445) J13(9.525,-4.445) J14(8.255,-4.445) J15(6.985,-4.445) J16(5.715,-4.445) J17(4.445,-4.445) J18(3.175,-4.445) J19(1.905,-4.445) J20(0.635,-4.445) J21(-0.635,-4.445) J22(-1.905,-4.445) J23(-3.175,-4.445) J24(-4.445,-4.445) J25(-5.715,-4.445) J26(-6.985,-4.445) J27(-8.255,-4.445) J28(-9.525,-4.445) J29(-10.795,-4.445) J30(-12.065,-4.445) J31(-13.335,-4.445) J32(-14.605,-4.445) J33(-15.875,-4.445) J34(-17.145,-4.445) J35(-18.415,-4.445) J36(-19.685,-4.445) J37(-20.955,-4.445) J38(-22.225,-4.445) J39(-23.495,-4.445) J40(-24.765,-4.445) K1(24.765,-5.715) K2(23.495,-5.715) K3(22.225,-5.715) K4(20.955,-5.715) K5(19.685,-5.715) K6(18.415,-5.715) K7(17.145,-5.715) K8(15.875,-5.715) K9(14.605,-5.715) K10(13.335,-5.715) K11(12.065,-5.715) K12(10.795,-5.715) K13(9.525,-5.715) K14(8.255,-5.715) K15(6.985,-5.715) K16(5.715,-5.715) K17(4.445,-5.715) K18(3.175,-5.715) K19(1.905,-5.715) K20(0.635,-5.715) K21(-0.635,-5.715) K22(-1.905,-5.715) K23(-3.175,-5.715) K24(-4.445,-5.715) K25(-5.715,-5.715) K26(-6.985,-5.715) K27(-8.255,-5.715) K28(-9.525,-5.715) K29(-10.795,-5.715) K30(-12.065,-5.715) K31(-13.335,-5.715) K32(-14.605,-5.715) K33(-15.875,-5.715) K34(-17.145,-5.715) K35(-18.415,-5.715) K36(-19.685,-5.715) K37(-20.955,-5.715) K38(-22.225,-5.715) K39(-23.495,-5.715) K40(-24.765,-5.715)
  round 0.97 hole 1.27 unplated: MH1(-27.19,-3.05) MH2(27.19,0)
  silkscreen extent -27.89,-7.34 28.78,7.34, body extent -27.89,-7.34 28.78,7.34, height 7.21
RTW24 [mm] "WQFN-24_TI"
  rect 0.705x0.25 smd: 1(-1.952,1.25) 2(-1.952,0.75) 3(-1.952,0.25) 4(-1.952,-0.25) 5(-1.952,-0.75) 6(-1.952,-1.25) 13(1.952,-1.25) 14(1.952,-0.75) 15(1.952,-0.25) 16(1.952,0.25) 17(1.952,0.75) 18(1.952,1.25)
  rect 0.25x0.705 smd: 7(-1.25,-1.952) 8(-0.75,-1.952) 9(-0.25,-1.952) 10(0.25,-1.952) 11(0.75,-1.952) 12(1.25,-1.952) 19(1.25,1.952) 20(0.75,1.952) 21(0.25,1.952) 22(-0.25,1.952) 23(-0.75,1.952) 24(-1.25,1.952)
  rect 2.6x2.6 smd paste-1.287: 25(0,0)
  silkscreen extent -2,-2 2,2, body extent -2.05,-2.05 2.05,2.05, height 0.8
TSSOP-24_TI [mm] "TSOP, 24-Leads, Body 7.9x4.5mm (max), Pitch 0.65mm, IPC Medium Density"
  oval 1.7x0.25 smd: 1(-3.05,3.575)
  rect 1.7x0.25 smd: 2(-3.05,2.925) 3(-3.05,2.275) 4(-3.05,1.625) 5(-3.05,0.975) 6(-3.05,0.325) 7(-3.05,-0.325) 8(-3.05,-0.975) 9(-3.05,-1.625) 10(-3.05,-2.275) 11(-3.05,-2.925) 12(-3.05,-3.575) 13(3.05,-3.575) 14(3.05,-2.925) 15(3.05,-2.275) 16(3.05,-1.625) 17(3.05,-0.975) 18(3.05,-0.325) 19(3.05,0.325) 20(3.05,0.975) 21(3.05,1.625) 22(3.05,2.275) 23(3.05,2.925) 24(3.05,3.575)
  silkscreen extent -3.18,-3.95 1.8,4.42, body extent -2.25,-3.95 2.25,3.95, height 1.2

## Part data
C1 C2 C3 C4 C5 C6: library part "Cap Semi", "Capacitor (Semiconductor SIM Model)"
C7 C8 C9 C10 C11 C12 C13 C14 C15 C16 C17 C18 C19: library part Cap_0603
J1: "Samtec HSMC Host Connector (Female)"
P1: "Board-to-Board Connector, Vertical, 10-Row, Pitch 1.27mm, 400-Position"
R2 R3 R4 R5 R6 R8 R9 R10 R11 R16: library part Res_0603, "0603 SMT Resistor"
U1 U2 U3: library part SN74AVC8T245PW, "8-bit Dual Supply Bus Transceiver"
U4 U5: library part LMK00105_RTW_24, "TI Universal-to-CMOS 5-Output Clock Buffer"

## Free pads (board coordinates)
  round 94.49 hole 106.3 unplated: MH1(135.43,408.27) MH2(135.43,2634.65)
  round 125.98 hole 106.3: MH3(2285.04,309.84) MH4(2285.04,2790.16)

## Via types
v1: diameter 24, hole 10, TopLayer to BottomLayer, tented both sides, 443 vias
v2: diameter 24, hole 10, TopLayer to BottomLayer, tented top, 56 vias
v3: diameter 26, hole 14, TopLayer to BottomLayer, tented both sides, 33 vias
v4: diameter 30, hole 16, TopLayer to BottomLayer, tented both sides, 32 vias
v5: diameter 250, hole 125, TopLayer to BottomLayer, tented both sides, 4 vias
v6: diameter 120, hole 100, TopLayer to BottomLayer, 1 vias
v7: diameter 24, hole 10, TopLayer to BottomLayer, 1 vias

## Nets (pads, with @x,y where several pads share a name; then routed paths per layer and width w, separated by ;. In a path a pad name is that pad's centre, name@x,y a point inside that pad or via, vN(x,y) a via of type N, cw(c..) or ccw(c..) an arc to the next point about the centre after c; other vN are vias at no path point)
3P3V: C4.2 C5.2 C6.2 C8.2 C9.2 C10.2 C11.2 C12.2 C13.2 C14.2 C15.2 J1.45 J1.51 J1.57 J1.63 J1.69 J1.75 J1.81 J1.87 J1.93 J1.99 J1.105 J1.111 J1.117 J1.123 J1.129 J1.135 J1.141 J1.147 J1.153 J1.159 P1.C39 P1.D36 P1.D38 P1.D40 U1.23 U1.24 U2.23 U2.24 U3.23 U3.24 U4.2 U4.6 U4.8 U4.9 U4.14 U4.18 U4.23 U4.24 U5.8 U5.9 U5.23 U5.24 | length 3438.4
  TopLayer w11.83: U1.24@1333.92,276.25 1279.25,276.25 v1(1273,270) 1251.12,270 C6.2@1232.12,289 1249.12,306 v1(1274,306) 1278.16,301.84 U1.23@1333.92,301.84 ; U3.24@1352.92,2183.25 1296.34,2183.25 v1(1286,2172.92) 1254.2,2172.92 C5.2@1238.12,2189 1254.12,2205 v1(1286,2205) 1289.84,2208.84 U3.23@1352.92,2208.84 ; U2.24@1353.92,2518.25 1304.25,2518.25 v1(1292,2506) 1281.68,2506 C4.2@1256.68,2531 1265.68,2540 v1(1292,2540) 1295.84,2543.84 U2.23@1353.92,2543.84 ; v4(2418.17,2304) P1.D36@2438.78,2324.61 v4(2418.17,2345.21) ; v4(2418.17,2404) P1.D38@2438.78,2424.61 v4(2468.17,2454) P1.C39@2488.78,2474.61 v4(2509.39,2495.21) ; v4(2418.17,2504) P1.D40@2438.78,2524.61 v4(2459.39,2545.21)
  BottomLayer w11.83: v3(726.06,1323.62) J1.93@810.75,1323.62 ; v3(726.9,1382.68) J1.87@810.75,1382.68 ; v3@726.9,1441.73 J1.81@810.75,1441.73 ; v3(728.5,890.55) J1.117@810.75,890.55 ; v3@745.01,1737.01 J1.51@810.75,1737.01 ; v3(746.06,1559.84) J1.69@810.75,1559.84 ; v3@746.06,1796.06 J1.45@810.75,1796.06 ; v3@746.9,1618.9 J1.63@810.75,1618.9 ; v3@746.95,1677.95 J1.57@810.75,1677.95 ; v3@747.11,1500.79 J1.75@810.75,1500.79 ; J1.159@810.75,477.17 v3(893,477.17) ; J1.153@810.75,536.22 v3(893,536.22) ; J1.147@810.75,595.28 v3(893,595.28) ; J1.141@810.75,654.33 v3(893,654.33) ; J1.135@810.75,713.39 v3(893,713.39) ; J1.129@810.75,772.44 v3(893,772.44) ; J1.123@810.75,831.5 v3(893,831.5) ; J1.111@810.75,949.61 v3(893,949.61) ; J1.105@810.75,1008.66 v3(893,1008.66) ; v3(810.75,1233) J1.99@810.75,1264.57 ; C8.2@1127.12,539 1155.12,511 v1(1220.12,511) ; C9.2@1127.47,594 v1(1158,594) v1@1158.35,594.35 ; C15.2@1131.12,907 1159,934.88 v1(1159,935.71) U5.8@1191.13,935.71 ; v1(1138,967) 1149.61,955.39 U5.9@1191.13,955.39 ; C12.2@1145.44,732 1149.28,735.84 v1(1240.47,735.84) U4.14@1240.47,700.75 ; U4.8@1193.13,594.35 v1@1158.35,594.35 ; U4.9@1193.13,614.04 1178.04,614.04 v1@1158.35,594.35 ; v1@1220.79,511.67 U4.6@1220.79,547.02 ; U4.2@1299.53,547.02 1299.53,501.53 v1(1275,477) 1276.88,475.12 C10.2@1314,475.12 ; U4.18@1319.21,700.75 1319.21,716.21 v1(1337,734) 1349,722 C13.2@1382.88,722 ; U5.24@1344.87,916.02 1360.98,916.02 v1(1377,900) ; U5.23@1344.87,935.71 1380.38,935.71 v1(1387,929.08) 1412.88,903.2 C14.2@1412.88,891 ; U4.24@1346.87,574.67 1379.67,574.67 v1(1387,582) ; U4.23@1346.87,594.35 1374.65,594.35 v1(1387,582) ; C11.2@1441,543.12 1425.88,543.12 v1(1387,582)
  other v3: 726.9,1442 746.9,1501 746,1618 746,1677 745,1737 746,1796
3P3VAUX: P1.D32
12P0V: J1.46 J1.52 J1.58 J1.64 J1.70 J1.76 J1.82 J1.88 J1.94 J1.100 J1.106 J1.112 J1.118 J1.124 J1.130 J1.136 J1.142 J1.148 J1.154 P1.C35 P1.C37 | length 2399.6
  TopLayer w11.83: v4(2468.17,2254) P1.C35@2488.78,2274.61 ; v4(2468.17,2295.21) P1.C35@2488.78,2274.61 ; v4(2468.17,2354) P1.C37@2488.78,2374.61 ; P1.C37@2489.17,2373.43 v4(2509.77,2352.83) ; P1.C37@2489.56,2374.21 v4(2510.17,2394.82) ; v4(2509.39,2254) P1.C35@2488.78,2274.61
  BottomLayer w11.83: v4(438.96,1259.34) 531.19,1259.34 536.42,1264.57 J1.100@585.25,1264.57 ; v4(438.96,1318.39) 531.19,1318.39 536.42,1323.62 J1.94@585.25,1323.62 ; v4(438.96,1377.45) 531.19,1377.45 536.42,1382.68 J1.88@585.25,1382.68 ; v4(438.96,1436.5) 531.19,1436.5 536.42,1441.73 J1.82@585.25,1441.73 ; v4(438.96,1495.56) 531.19,1495.56 536.42,1500.79 J1.76@585.25,1500.79 ; v4(438.96,1554.61) 531.19,1554.61 536.42,1559.84 J1.70@585.25,1559.84 ; v4(438.96,1613.67) 531.19,1613.67 536.42,1618.9 J1.64@585.25,1618.9 ; v4(438.96,1672.72) 531.19,1672.72 536.42,1677.95 J1.58@585.25,1677.95 ; v4(438.96,1731.78) 531.19,1731.78 536.42,1737.01 J1.52@585.25,1737.01 ; v4(438.96,1790.83) 531.19,1790.83 536.42,1796.06 J1.46@585.25,1796.06 ; v3(503,536.22) J1.154@585.25,536.22 ; v3(503,595.28) J1.148@585.25,595.28 ; v3(503,654.33) J1.142@585.25,654.33 ; v3(503,713.39) J1.136@585.25,713.39 ; v3(503,772.44) J1.130@585.25,772.44 ; v3(503,890.55) J1.118@585.25,890.55 ; v3(503,949.61) J1.112@585.25,949.61 ; v3(503,1008.66) J1.106@585.25,1008.66 ; J1.124@585.25,831.5 v3(667.5,831.5)
\LED_1: J1.26 U2.21 | length 1229.6
  TopLayer w11.83: v1(481,2436) 481,2512 564.02,2595.02 U2.21@1353.92,2595.02
  BottomLayer w11.83: v1(481,2436) 481,2312 524.5,2268.5 J1.26@585.25,2268.5
\LED_2: J1.28 U2.20 | length 1311.6
  TopLayer w11.83: v1(450,2436) 450,2517.19 553.42,2620.62 U2.20@1353.92,2620.62
  BottomLayer w11.83: v1(450,2436) 450,2315 516.18,2248.82 J1.28@585.25,2248.82
\LED_3: J1.30 U2.19 | length 1428.8
  TopLayer w11.83: v1(419,2436) 419,2522.38 542.82,2646.21 U2.19@1353.92,2646.21
  BottomLayer w11.83: v1(419,2436) 419,2272 481.55,2209.45 J1.30@585.25,2209.45
\LED_4: J1.32 U2.18 | length 1512.5
  TopLayer w11.83: v1(388,2436) 388,2527.57 532.22,2671.8 U2.18@1353.92,2671.8
  BottomLayer w11.83: v1(388,2436) 388,2272 470.24,2189.76 J1.32@585.25,2189.76
\UC_RESET: J1.122 P1.D34 | length 4802.5
  TopLayer w11.83: v1(130,963) 124,969 124,2452 v1@486.8,2814.8 ; v1(1008.58,2817.58) 1241.29,2817.58 1274.71,2851 1673.29,2851 1706.71,2817.58 v2(1939.42,2817.58) ; v1(2418.17,2245.21) P1.D34@2438.78,2224.61
  MidLayer1 w11.83: v1(130,963) 241.82,851.18 v1(498.31,851.18) ; v1(489.58,2817.58) 495.08,2812.08 1003.08,2812.08 v1(1008.58,2817.58)
  BottomLayer w11.83: v1(498.31,851.18) J1.122@585.25,851.18 ; v2(1939.42,2817.58) 2184.47,2572.53 2184.47,2498.23 2212.57,2470.13 2237.28,2470.13 2390.26,2317.15 2390.26,2276.08 2418.17,2248.17 v1(2418.17,2245.21)
AUX_1: J1.132
AUX_2: J1.134
BUFF_TX_CLK: R3.1 U5.3 | length 458.5
  BottomLayer w11.83: R3.1@980,950 980,902.49 1090.32,792.17 1228.71,792.17 1277.84,841.3 U5.3@1277.84,888.37
CLK0_M2C_N: P1.H5 R6.1 | length 343.6
  TopLayer w11.83: v1(2218.17,754) P1.H5@2238.78,774.61
  BottomLayer w11.83: R6.1@1946,756 1962,756 2014,704 2062.08,704 2084.08,726 2190.17,726 v1(2218.17,754)
CLK0_M2C_P: P1.H4 R5.1 R8.1 | length 358.3
  TopLayer w11.83: v2(2218.17,704) P1.H4@2238.78,724.61
  BottomLayer w11.83: R8.1@1955,709 R5.1@1955,661 2049.96,661 2093.13,704.17 2218.01,704.17 v2(2218.17,704)
CLK1_M2C_N: P1.G3
CLK1_M2C_P: P1.G2
CLK2_BIDIR_N: P1.K5 R16.1 U5.20 | length 916.7
  TopLayer w11.83: v2(2049,766.92) 2055.08,760.83 2125.01,760.83 P1.K5@2138.78,774.61
  BottomLayer w11.83: U5.20@1344.87,994.76 1456.76,994.76 R16.1@1475,1013 1491.17,996.83 1788.04,996.83 1806.44,978.44 2024.04,760.83 2042.92,760.83 v2(2049,766.92)
CLK2_BIDIR_P: P1.K4 R16.2 U5.21 | length 922.3
  TopLayer w11.83: v2(2049,732.92) 2055.08,739 2124.39,739 P1.K4@2138.78,724.61 P1.K4@2133.39,724.61
  BottomLayer w11.83: U5.21@1344.87,975.08 1457.8,975.08 R16.2@1475,957.88 1492.12,975 1779,975 2015,739 2042.92,739 v2(2049,732.92)
CLK3_BIDIR_N: P1.J3 R11.1 U4.20 | length 888.1
  TopLayer w11.83: v1(2168.17,654) P1.J3@2188.78,674.61
  BottomLayer w11.83: U4.20@1346.87,653.41 1482.41,653.41 R11.1@1500,671 1516.17,654.83 1846.13,654.83 1875.13,625.83 2140.01,625.83 v1(2168.17,654)
CLK3_BIDIR_P: P1.J2 R11.2 U4.21 | length 879.2
  TopLayer w11.83: v1(2168.17,604) P1.J2@2188.78,624.61
  BottomLayer w11.83: U4.21@1346.87,633.72 1482.16,633.72 R11.2@1500,615.88 1519.82,635.7 1834.38,635.7 1866.08,604 v1(2168.17,604)
CLK_DIR: P1.B1
CTRLSEL: J1.121
DP0_C2M_N: J3.2 P1.C3 | length 761.3
  TopLayer w11.83: v1(2468.17,654) P1.C3@2488.78,674.61
  BottomLayer w11.83: J3.2@1900,312.37 1900,313.43 1984.29,397.72 2033.63,397.72 2094.33,458.42 2224.59,458.42 2343.26,577.09 2343.26,614.32 2357.85,628.92 2443.09,628.92 v1(2468.17,654)
DP0_C2M_P: J3.1 P1.C2 | length 618.1
  TopLayer w11.83: v1(2468.17,604) P1.C2@2488.78,624.61
  BottomLayer w11.83: J3.1@2000,312.37 2008.74,312.37 2131.2,434.83 2231.87,434.83 2375.96,578.92 2443.09,578.92 v1(2468.17,604)
DP0_M2C_N: P1.C7
DP0_M2C_P: P1.C6
DP1_C2M_N: P1.A23
DP1_C2M_P: P1.A22
DP1_M2C_N: P1.A3
DP1_M2C_P: P1.A2
DP2_C2M_N: P1.A27
DP2_C2M_P: P1.A26
DP2_M2C_N: P1.A7
DP2_M2C_P: P1.A6
DP3_C2M_N: P1.A31
DP3_C2M_P: P1.A30
DP3_M2C_N: P1.A11
DP3_M2C_P: P1.A10
DP4_C2M_N: P1.A35
DP4_C2M_P: P1.A34
DP4_M2C_N: P1.A15
DP4_M2C_P: P1.A14
DP5_C2M_N: P1.A39
DP5_C2M_P: P1.A38
DP5_M2C_N: P1.A19
DP5_M2C_P: P1.A18
DP6_C2M_N: P1.B37
DP6_C2M_P: P1.B36
DP6_M2C_N: P1.B17
DP6_M2C_P: P1.B16
DP7_C2M_N: P1.B33
DP7_C2M_P: P1.B32
DP7_M2C_N: P1.B13
DP7_M2C_P: P1.B12
DP8_C2M_N: P1.B29
DP8_C2M_P: P1.B28
DP8_M2C_N: P1.B9
DP8_M2C_P: P1.B8
DP9_C2M_N: P1.B25
DP9_C2M_P: P1.B24
DP9_M2C_N: P1.B5
DP9_M2C_P: P1.B4
FPGA_TX_CLK: P1.D17 R4.1 | length 1977
  TopLayer w11.83: v1(2418.17,1354) P1.D17@2438.78,1374.61
  MidLayer1 w11.83: v1(1375,1557) 2121.15,1557 2149.07,1529.08 2155.07,1529.08 2155.23,1528.92 2199.23,1528.92 2207.85,1520.3 2319.54,1520.3 2334.3,1505.53 2334.3,1482.16 2393.09,1423.38 2393.09,1379.08 v1(2418.17,1354)
  BottomLayer w11.83: R4.1@1035,1051.12 1070.12,1051.12 1131.58,1112.58 1325.58,1112.58 1375,1162 v1(1375,1557)
GA0: P1.C34
GA1: P1.D35
GBTCLK0_M2C_N: P1.D5
GBTCLK0_M2C_P: P1.D4